# Altium PCB PIC24E_Extension_PCB.PcbDoc
Units mil, origin at the board's own origin, x right, y up, seen from the top; angles counter-clockwise.
Board outline 2730 x 2910 mil, 2 copper layers (Top Layer, Bottom Layer); 50 components, 78 nets, 280 pads, 145 vias.
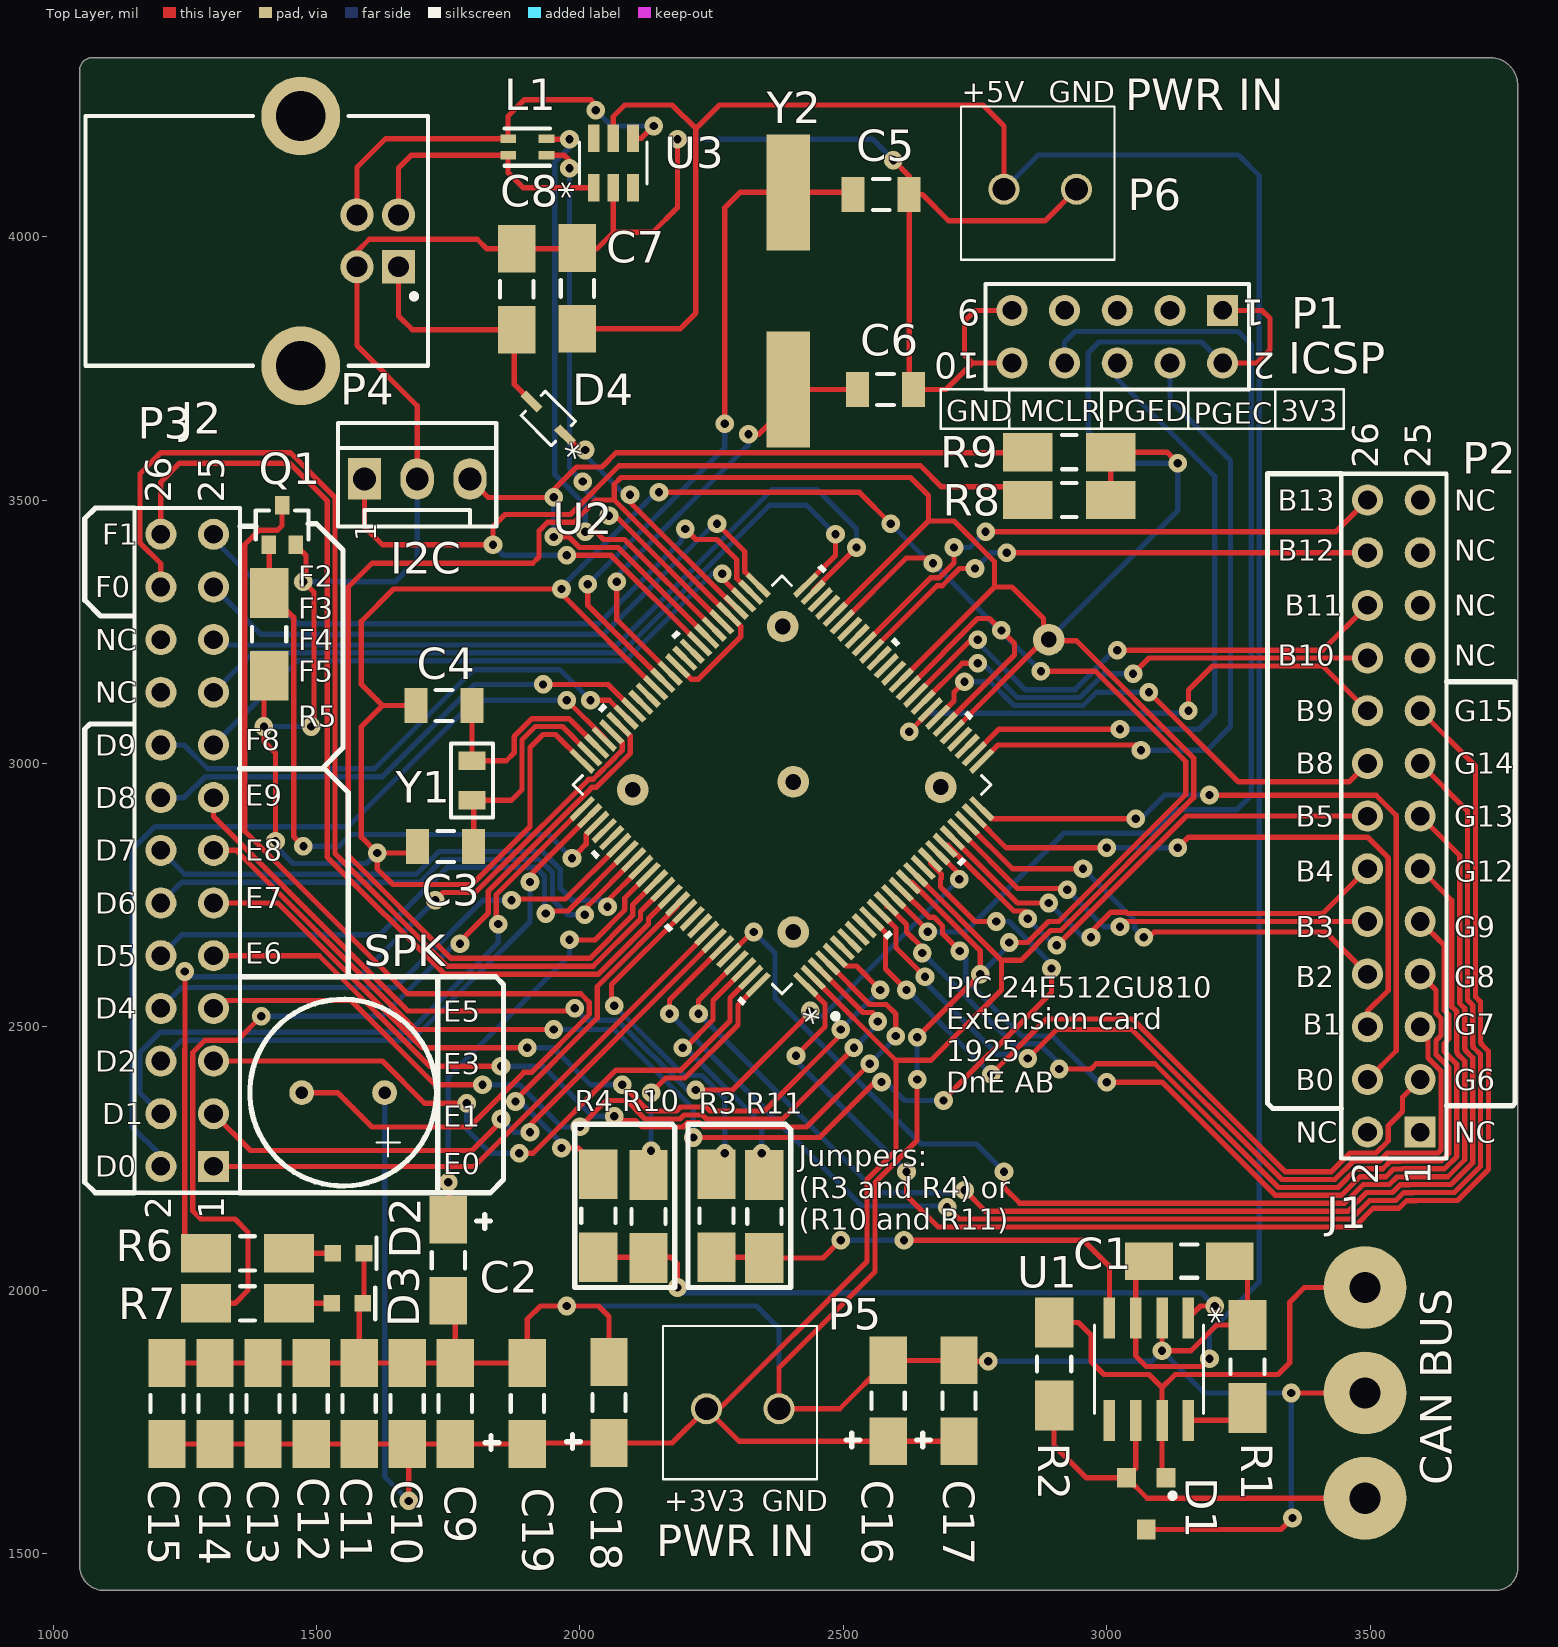
[diagram p0: Top Layer view]
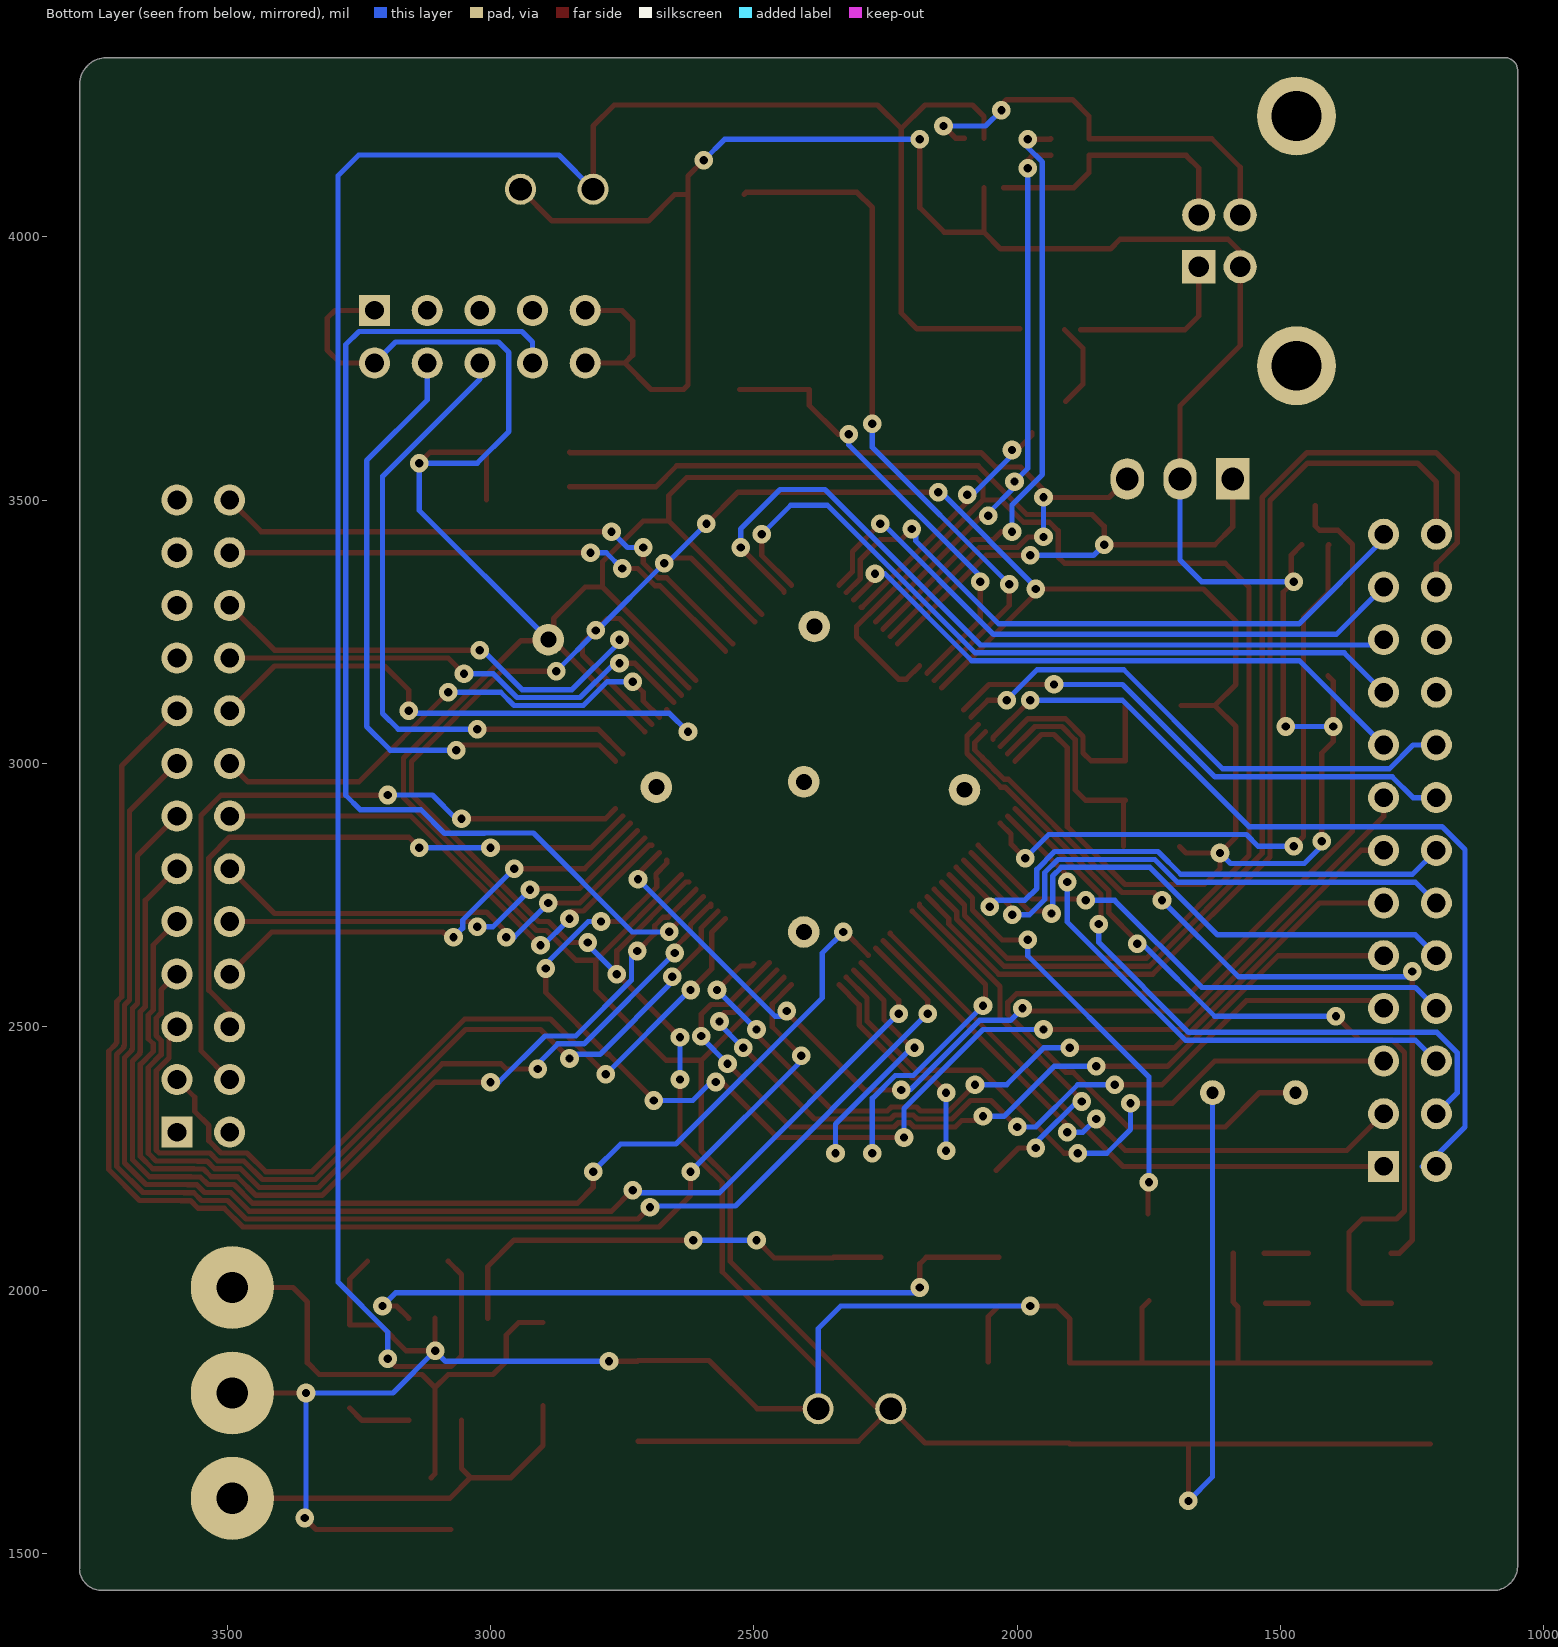
[diagram p1: Bottom Layer view, seen from below]
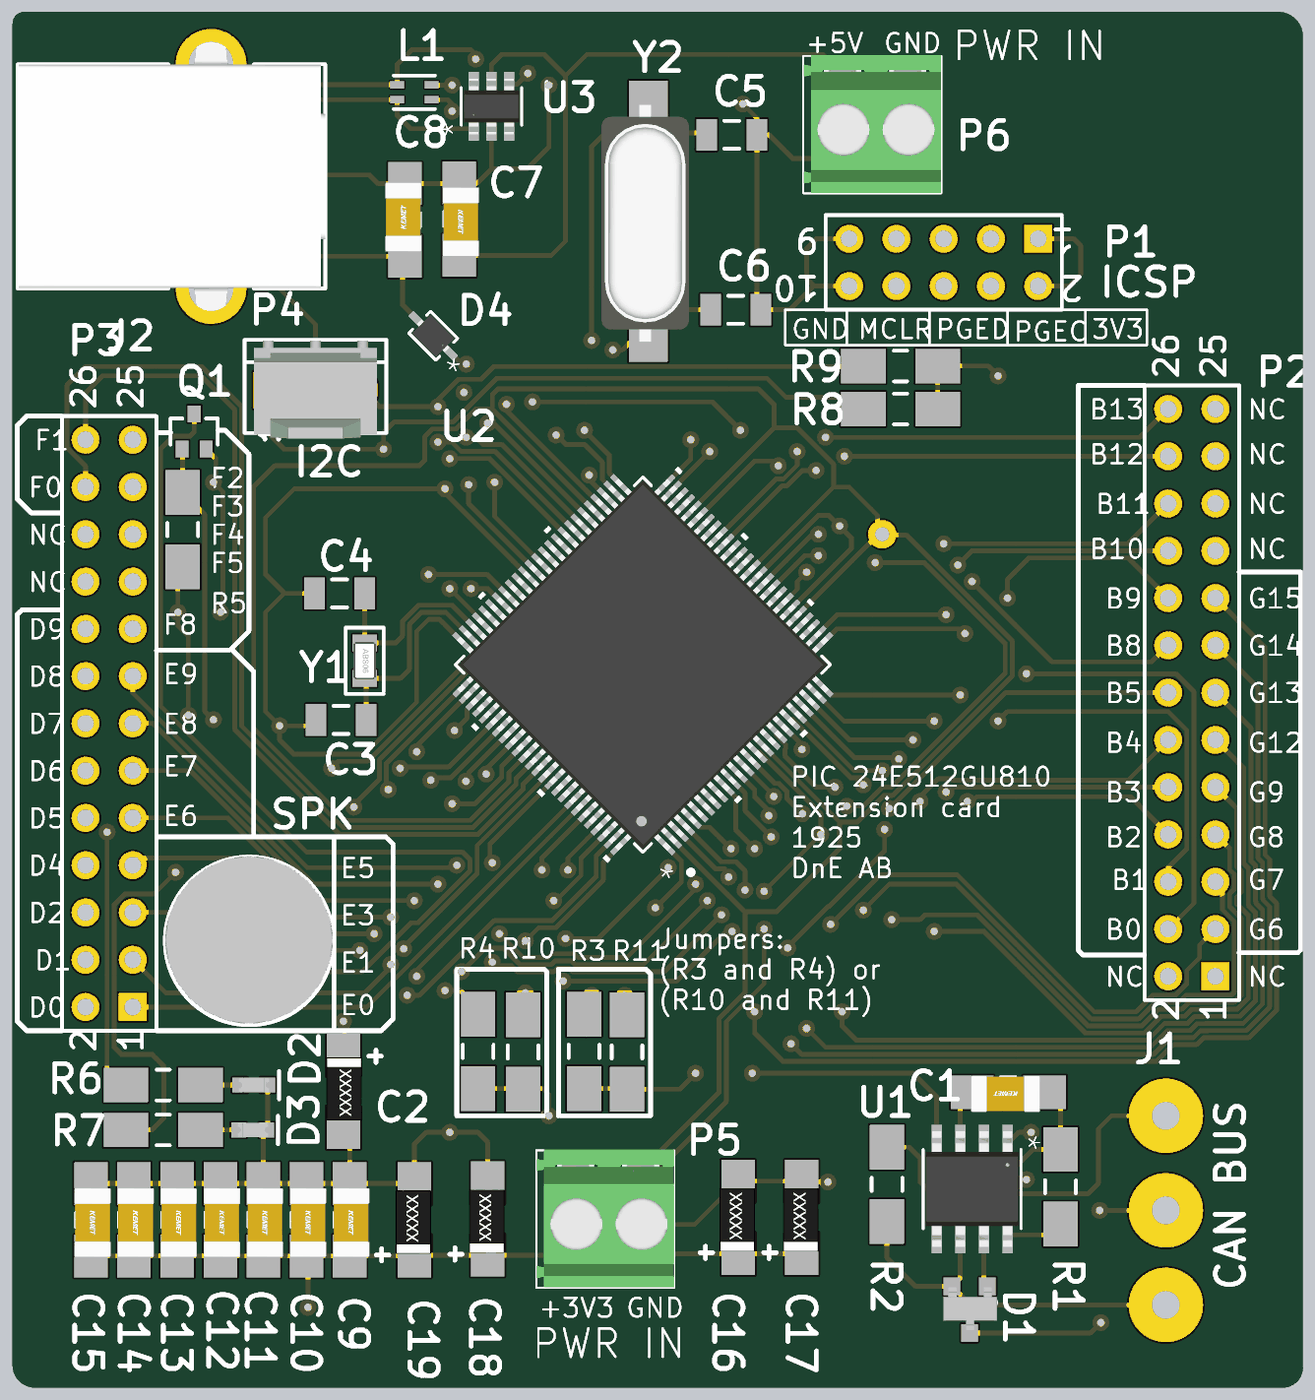
[diagram p2: 3D render of the assembled board from above, using the file's embedded part models]

## Layer stack, top to bottom
Top Solder: solder mask 0.4, Solder Resist, Dk 3.5
Top Layer: signal copper 1.4
Dielectric 1: dielectric 12.6, FR-4, Dk 4.8
Bottom Layer: signal copper 1.4
Bottom Solder: solder mask 0.4, Solder Resist, Dk 3.5

## Board outline
1050,1475 1050,4315 cw(c1075,4315) 1075,4340 3725,4340 cw(c3727.5,4287.5) 3780,4290 3780,1475 cw(c3737.5,1472.5) 3740,1430 1100,1430 cw(c1097.5,1477.5)

## Design rules (kind name [scope] priority, off if disabled: settings)
Clearance [All] p1: gap=5 ignorepadtopadclearanceinfootprint=FALSE
DiffPairsRouting [All] p1: maxlimit=10 minlimit=5 mostfreqgap=10 toplayer_minwidth=15 toplayer_maxwidth=15 toplayer_prefwidth=15 bottomlayer_minwidth=15 bottomlayer_maxwidth=15 bottomlayer_prefwidth=15 maxuncoupledlength=500
HoleToHoleClearance [All] p1: gap=5 allowstackedmicrovias=TRUE
MinimumSolderMaskSliver [All] p1: minsoldermaskwidth=5
PolygonConnect [All] p1: connectstyle=Relief reliefconductorwidth=10 reliefentries=4 polygonreliefangle="90 Angle" airgapwidth=10
RoutingVias [All] p1: holewidth=15.75 width=35.43 viastyle="Through Hole" minholewidth=15.75 minwidth=35.43 maxholewidth=23.62 maxwidth=39.37
SilkToSilkClearance [All] p1: silktosilkclearance=0
SilkToSolderMaskClearance [IsPad] p1: minsilkscreentomaskgap=0 clearancetoexposedcopper=TRUE
SolderMaskExpansion [All] p1: expansion=4
Width [All] p1: maxlimit=10 minlimit=10 preferedwidth=10
25 further rules are at their usual default settings.

## Components (designator, comment, footprint, x,y, rotation, side; value= is the part's Value field where it differs from the comment)
C1 "100nF" C1206#1 3156.77,2055 r180 top
C2 "10uF" "C1206 - TANT" 1750,2056.77 r270 top
C3 "22pF" C1206#2 1745,2842.35 r180 top
C4 "22pF" C1206#2 1741.85,3110 r180 top
C5 "22pF" C1206#2 2571.72,4080 r0 top
C6 "22pF" C1206#2 2580,3710 r0 top
C7 "100nF" C1206#1 1995,3901.77 r270 top
C8 "1uF" C1206#1 1880,3900 r90 top
C9 "100nF" C1206#1 1763.22,1785 r270 top
C10 "100nF" C1206#1 1672,1785 r270 top
C11 "100nF" C1206#1 1580.79,1785 r270 top
C12 "100nF" C1206#1 1489.57,1785 r270 top
C13 "100nF" C1206#1 1398.35,1785 r270 top
C14 "100nF" C1206#1 1307.14,1785 r270 top
C15 "100nF" C1206#1 1215.92,1785 r270 top
C16 "10uF" "C1206 - TANT" 2585,1790 r90 top
C17 "10uF" "C1206 - TANT" 2719.44,1790 r90 top
C18 "10uF" "C1206 - TANT" 2055,1786.77 r90 top
C19 "10uF" "C1206 - TANT" 1900,1785 r90 top
D1 "CDSOT23" SOT-23-3 3075,1595 r180 top
D2 "LED" D0603_Directional 1530.94,2070 r0 top
D3 "LED" D0603_Directional 1528.48,1975 r0 top
D4 "BAT43WS" SOD323 1940,3655 r135 top
J1 "HEADER" TerminalBlock3P508 3490,2005 r270 top
J2 "USB Type B" "USB-B RECEPTACLE" 1616.06,3992.01 r180 top
L1 "ACM2012-900-2P-T002" ACM2012 1900,4170 r180 top
P1 "Header 5X2" HDR2X5 3220,3860 r180 top
P2 "Header 13X2" HDR2X13 3595,2300 r90 top
P3 "Header 13X2" HDR2X13 1304.37,2235 r90 top
P4 "76384-303LF" HDR_1x3_2.54MM_SHDR_V2 1590.97,3540 r90 top
P5 "Terminal" SRW_TRM 2240,1775 r0 top
P6 "Terminal" SRW_TRM 2805,4090 r0 top
Q1 "MOSFET N-CH 20V 1A SOT323" SC70_SOT323 1434.41,3452.4 r90 top
R1 "10R" R1206 3267.08,1855 r90 top
R2 "120R" R1206 2900,1860 r90 top
R3 "0R" R1206 2259.16,2141.26 r270 top
R4 "0R" R1206 2035,2141.26 r270 top
R5 "47k5" R1206 1410,3245 r90 top
R6 "240R" R1206 1368.74,2070 r180 top
R7 "240R" R1206 1368.74,1975 r180 top
R8 "1K" R1206 2928.74,3500 r0 top
R9 "1K" R1206 2928.74,3590.84 r0 top
R10 "0R" R1206 2130,2140 r270 top
R11 "0R" R1206 2350,2140 r270 top
SPK "GT-0903A" GT-0903A 1629.22,2375 r180 top (schematic designator LS1)
U1 "296-26335-1-ND" D8 3080,1850 r270 top value=Value
U2 "PIC24EP512GU810-I/PF-ND" TQFP100_14x14MC 2383.49,2959.22 r135 top value=Value
U3 "TVS DIODE 5V 8.1V SOT23-6" 21-0058I 2063.25,4140 r90 top value=Value
Y1 "XTAL-32.7680kHz" "C0805 - OSC" 1795,2967.6 r270 top
Y2 "XTAL-8MHz" HC49/US 2395,3897.01 r90 top

## Footprints (in the part's own frame and the unit in brackets; to place one, negate y for a bottom-side part, rotate by r counter-clockwise, add the part's x,y. Pads: shape width x height; smd on the part's side, far side on the other; paste and mask are expansions set on the pad)
21-0058I [mil]
  rect 52x22 smd paste+0 mask+0: 1(-47,37.4) 2(-47,0) 3(-47,-37.4) 4(47,-37.4) 5(47,0) 6(47,37.4)
  silkscreen extent -40,-64 40,64, body extent -59,-59 59,59, height 57
ACM2012 [mm]
  rect 0.75x0.4 smd mask+0.076: 1(-0.925,0.4) 2(-0.925,-0.4) 3(0.925,-0.4) 4(0.925,0.4)
  silkscreen extent -1.1,-0.9 1.1,0.9, body extent -1.2,-0.7 1.2,0.7, height 1.3
"C0805 - OSC" [mm]
  rect 0.9x1.3 smd: 1(-0.95,0) 2(0.95,0)
  silkscreen extent -1.78,-1.02 1.78,1.02, body extent -1,-0.6 1,0.6, height 0.61
C1206#1 [mm]
  rect 2.3x1.8 smd: 1(-1.95,0) 2(1.95,0)
  silkscreen extent -0.4,-0.8 0.4,0.8, body extent -1.7,-0.89 2,1.06, height 1.85
C1206#2 [mm] "Chip Capacitor, Body 3.2x1.6mm, IPC High Density"
  rect 1.1x1.7 smd: 1(-1.35,0) 2(1.35,0)
  silkscreen extent -0.4,-0.75 0.4,0.75, body extent -1.7,-0.9 1.7,0.9, height 1.3
"C1206 - TANT" [mm]
  rect 2.3x1.8 smd: 1(-1.95,0) 2(1.95,0)
  silkscreen extent -2.21,-0.8 0.4,2.03, body extent -1.83,-0.91 1.57,0.99, height 1.77
D8 [mil]
  rect 78x22 smd paste+0 mask+0: 1(-97,75) 2(-97,25) 3(-97,-25) 4(-97,-75) 5(97,-75) 6(97,-25) 7(97,25) 8(97,75)
  silkscreen extent -84,-104 84,104, body extent -122,-98 122,99, height 69
D0603_Directional [mm]
  rect 0.8x0.8 smd: 1(0,0) 2(1.5,0)
  silkscreen extent 2.11,-0.76 2.11,0.76, body extent -0.05,-0.39 1.57,0.39, height 0.71
GT-0903A [mm]
  round 1.2 hole 0.6: 1(0,0) 2(4,0)
  silkscreen extent -2.5,-4.5 6.5,4.5, body extent -2.5,-4.55 6.5,4.45, height 4.21
HC49/US [mm]
  rect 5.6x2.1 smd: 1(-4.75,0) 2(4.75,0)
  body extent -6.45,-2.18 6.25,2.51, height 4.06
HDR2X5 [mm] "Connector; Header; 5x2 Position"
  rect 1.5x1.5 hole 0.9: 1(0,0)
  round 1.5 hole 0.9: 2(0,2.54) 3(2.54,0) 4(2.54,2.54) 5(5.08,0) 6(5.08,2.54) 7(7.62,0) 8(7.62,2.54) 9(10.16,0) 10(10.16,2.54)
  silkscreen extent -1.27,-1.27 11.43,3.81
HDR2X13 [mm] "Connector; Header; 13x2 Position"
  rect 1.5x1.5 hole 0.9: 1(0,0)
  round 1.5 hole 0.9: 2(0,2.54) 3(2.54,0) 4(2.54,2.54) 5(5.08,0) 6(5.08,2.54) 7(7.62,0) 8(7.62,2.54) 9(10.16,0) 10(10.16,2.54) 11(12.7,0) 12(12.7,2.54) 13(15.24,0) 14(15.24,2.54) 15(17.78,0) 16(17.78,2.54) 17(20.32,0) 18(20.32,2.54) 19(22.86,0) 20(22.86,2.54) 21(25.4,0) 22(25.4,2.54) 23(27.94,0) 24(27.94,2.54) 25(30.48,0) 26(30.48,2.54)
  silkscreen extent -1.27,-1.27 31.75,3.81
HDR_1x3_2.54MM_SHDR_V2 [mm]
  rect 2x1.6 hole 1.1: 1(0,0)
  oval 2x1.6 hole 1.1: 2(0,-2.54) 3(0,-5.08)
  silkscreen extent -2.3,-6.35 2.7,1.27, body extent -2.6,-5.85 2.65,0.77, height 9.34
R1206 [mm]
  rect 2.4x1.85 smd: 1(-2,0) 2(2,0)
  silkscreen extent -0.35,-0.82 0.35,0.82, body extent -1.75,-0.91 1.75,0.91, height 0.7
SC70_SOT323 [mm]
  rect 0.9x0.7 smd: 1(-0.95,0.65) 2(-0.95,-0.65) 3(0.95,0)
  silkscreen extent -0.7,-1.27 0.7,1.27, body extent -1.27,-1.27 1.27,1.27, height 1.1
SOD323 [mm]
  rect 1.111x0.401 smd paste+0 mask+0: 1(-1.15,0) 2(1.15,0)
  silkscreen extent -1.03,-0.83 1.03,0.83, body extent -1.35,-0.7 1.35,0.7, height 0.81
SOT-23-3 [mm] "SOT-23; 3 Leads; Body 3.0 x 2.6 mm, inc. leads (LxW max)"
  rect 0.9x0.95 smd: 1(-0.95,-1.25) 2(0.95,-1.25) 3(0,1.25)
  silkscreen extent -1.39,-0.51 -1.14,-0.26, body extent -1.49,-1.2 1.43,1.1, height 1.03
SRW_TRM [mm]
  round 1.5 hole 1.1: 1(0,0) 2(3.5,0)
  silkscreen extent -2.08,-3.4 5.33,3.99, body extent -2.07,-3.38 5.33,4.02, height 8.42
TerminalBlock3P508 [mm]
  round 4 hole 1.5: 1(0,0) 2(5.08,0) 3(10.16,0)
TQFP100_14x14MC [mil]
  rect 58x11 smd paste+0 mask+0: 1(-300,236.22) 2(-300,216.54) 3(-300,196.85) 4(-300,177.17) 5(-300,157.48) 6(-300,137.8) 7(-300,118.11) 8(-300,98.43) 9(-300,78.74) 10(-300,59.06) 11(-300,39.37) 12(-300,19.69) 13(-300,0) 14(-300,-19.68) 15(-300,-39.37) 16(-300,-59.06) 17(-300,-78.74) 18(-300,-98.43) 19(-300,-118.11) 20(-300,-137.8) 21(-300,-157.48) 22(-300,-177.17) 23(-300,-196.85) 24(-300,-216.54) 25(-300,-236.22) 51(300,-236.22) 52(300,-216.54) 53(300,-196.85) 54(300,-177.17) 55(300,-157.48) 56(300,-137.8) 57(300,-118.11) 58(300,-98.43) 59(300,-78.74) 60(300,-59.06) 61(300,-39.37) 62(300,-19.68) 63(300,0) 64(300,19.68) 65(300,39.37) 66(300,59.06) 67(300,78.74) 68(300,98.43) 69(300,118.11) 70(300,137.8) 71(300,157.48) 72(300,177.17) 73(300,196.85) 74(300,216.54) 75(300,236.22)
  rect 11x58 smd paste+0 mask+0: 26(-236.22,-300) 27(-216.54,-300) 28(-196.85,-300) 29(-177.17,-300) 30(-157.48,-300) 31(-137.8,-300) 32(-118.11,-300) 33(-98.43,-300) 34(-78.74,-300) 35(-59.06,-300) 36(-39.37,-300) 37(-19.69,-300) 38(0,-300) 39(19.69,-300) 40(39.37,-300) 41(59.06,-300) 42(78.74,-300) 43(98.43,-300) 44(118.11,-300) 45(137.8,-300) 46(157.48,-300) 47(177.17,-300) 48(196.85,-300) 49(216.54,-300) 50(236.22,-300) 76(236.22,300) 77(216.54,300) 78(196.85,300) 79(177.17,300) 80(157.48,300) 81(137.8,300) 82(118.11,300) 83(98.43,300) 84(78.74,300) 85(59.06,300) 86(39.37,300) 87(19.69,300) 88(0,300) 89(-19.68,300) 90(-39.37,300) 91(-59.06,300) 92(-78.74,300) 93(-98.43,300) 94(-118.11,300) 95(-137.8,300) 96(-157.48,300) 97(-177.17,300) 98(-196.85,300) 99(-216.54,300) 100(-236.22,300)
  silkscreen extent -349,-349 349,349, body extent -315,-315 315,315, height 47
"USB-B RECEPTACLE" [mm]
  rect 1.6x1.6 hole 1: 1(-1,1.25)
  round 1.6 hole 1: 2(-1,-1.25) 3(1,-1.25) 4(1,1.25)
  round 3.8 hole 2.4: 5(3.71,6.02) 6(3.71,-6.02)
  silkscreen extent -2.43,-6.02 14.1,6.02, body extent -2.44,-7.45 14.06,7.45, height 11.02

## Part data
C1 C7 C9 C10 C11 C12 C13 C14 C15: library part CL05A104KA5NNNC, "MLCC (3216) 1206 100nF 100VDC ±10% X7R", Applications="General Purpose", Product Name=CL31B104KCFNNNE
C2 C16 C17 C18 C19: library part T491A106K016AT, "CAP.TANTAL 10uF 16V 10% A CASE (3216) SMD", Product Name=T491A106K016AT
C3 C4 C5 C6: library part CL21A226MOCLRNC, "MLCC (3216) 1206 22pF 50VDC ±5% C0G (NP0)", Product Name=CL31C220JBCNNNC
C8: library part CGA5L3X8R1H105K1, "MLCC (3216) 1206 1uF 16VDC ±5% X7R", Product Name=CL31B105JOFNNNE
D1: "DIODE TVS 24VWM 40VC SOT23", Product Name=CDSOT23-T24CAN
D2 D3: library part "LS Q976-NR-1", "LED RED DIFFUSED 0603 SMD", Color=Red, Current - Test=20mA, Lens Color=White, Manufacturer 1="OSRAM Opto Semiconductors Inc.", Millicandela Rating=104mcd, Package / Case="0603 (1608 Metric)", Supplier Device Package=0603, Supplier Part Number 1=475-2512-1-ND, Voltage - Forward (Vf) (Typ)=2V, Category=Optoelectronics, ComponentLink1Description=https://dammedia.osram.info/media/resource/hires/osram-dam-2493499/LS%20Q976.pdf, ComponentLink1URL=https://dammedia.osram.info/media/resource/hires/osram-dam-2493499/LS%20Q976.pdf, Description 1="LED RED DIFFUSED 0603 SMD", Features=-, Height (Max)=0.80mm, LatestRevisionDate=08-Jul-2005, LatestRevisionNote="Mech Layer 1 removed.", Lens Style/Size="Rectangle with Flat Top, 1.00mm x 0.80mm", Lens Transparency=Diffused, Manufacturer Part Number 1="LS Q976-NR-1", Mounting Type="Surface Mount", PackageDescription="LED; 2 Leads", PackageReference=LED-0, Packaging="Cut Tape (CT)", Part Status=Active, Pricing 1="1=0.38, 10=0.274, 25=0.202, 100=0.1444, 250=0.0982, 500=0.08664, 1000=0.06787 (USD)", Published=8-Jun-2000, Publisher="Altium Limited", RoHS="RoHS Compliant", Size / Dimension="1.60mm L x 0.80mm W", Stock 1=127302, Supplier 1=Digi-Key, Viewing Angle=160°, Wavelength - Dominant=633nm, Wavelength - Peak=645nm
D4: library part BAT43WS-7-F, "DIODE SCHOTTKY 30V 200MA SOD323", Capacitance @ Vr, F="10pF @ 1V, 1MHz", Current - Average Rectified (Io)="200mA (DC)", Manufacturer 1="Diodes Incorporated", Operating Temperature - Junction="-55°C ~ 125°C", Package / Case="SC-76, SOD-323", Supplier Device Package=SOD-323, Supplier Part Number 1=BAT43WS-FDICT-ND, Base Part Number=BAT43WS, Category="Discrete Semiconductor Products", ComponentLink1Description=https://www.diodes.com/assets/Datasheets/ds30100.pdf, ComponentLink1URL=https://www.diodes.com/assets/Datasheets/ds30100.pdf, Description 1="DIODE SCHOTTKY 30V 200MA SOD323", Diode Type=Schottky, Manufacturer Part Number 1=BAT43WS-7-F, Mounting Type="Surface Mount", Packaging="Cut Tape (CT)", Part Status=Active, Pricing 1="1=0.47, 10=0.352, 100=0.2028, 500=0.13698, 1000=0.10685 (USD)", RoHS="RoHS Compliant", Speed="Small Signal =< 200mA (Io), Any Speed", Stock 1=45041, Supplier 1=Digi-Key
J1: library part 796644-3, "PIN HEADER 3PIN(1x3) 2.00mm THT V/T", Product Name=L-KLS1-207B-1-03-S
J2: library part 292304-1, "CONNECTOR USB B TYPE RIGHT ANGLE 90C CONNFLY", Product Name=DS1099-WN0
L1: "CHOKE COMM MODE 90 OHM .4A SMD", Current=400mA, DC Resistance (DCR)="190 mOhm Max", Inductance=-, Manufacturer="TDK Corporation", Operating Temperature="-25°C ~ 85°C", Package / Case="0805 (2012 Metric), 4 Lead", Power (Watts)="0.063W, 1/16W", Resistance (Ohms)=8.2K, Supplier Part Number 1=445-2207-1-ND, Temperature Coefficient=±100ppm/°C, Tolerance=±1%, .Checked PCB=CHK, .Checked SCH=CHK, Category=Filters, ComponentLink1Description=http://www.tdk.co.jp/tefe02/e9719_acm2012.pdf, ComponentLink1URL=http://www.tdk.co.jp/tefe02/e9719_acm2012.pdf, ComponentLink2Description=http://www.yageo.com/documents/recent/PYu-RC0402_51_RoHS_L_6.pdf, ComponentLink2URL=http://www.yageo.com/documents/recent/PYu-RC0402_51_RoHS_L_6.pdf, Composition="Thick Film", Features=-, Filter Type="Data, Signal Line", Height="0.016\" (0.40mm)", Height (Max)="0.051\" (1.30mm)", Impedance="90 Ohm", Manufacturer Part Number=ACM2012-900-2P-T002, Mounting Type="Surface Mount", Number of Lines=2, Number of Terminations=2, Packaging="Cut Tape (CT)", Pricing 1="1=0.48, 10=0.448, 50=0.42, 100=0.364, 500=0.308, 1000=0.252 (USD)", RoHS="RoHS Compliant", Size / Dimension="0.079\" L x 0.047\" W (2.00mm x 1.20mm)", Stock 1=175768, Supplier 1=Digi-Key
P1: "Header, 5-Pin, Dual row", LatestRevisionDate=17-Jul-2002, LatestRevisionNote="Re-released for DXP Platform.", Publisher="Altium Limited"
P2 P3: "Header, 13-Pin, Dual row", LatestRevisionDate=17-Jul-2002, LatestRevisionNote="Re-released for DXP Platform.", Publisher="Altium Limited"
P4: "CONN HEADER 3POS .100\" STR GOLD", Color=Black, Manufacturer=FCI, Supplier Part Number 1=609-1305-ND, .Checked PCB=CHK, .Checked SCH=CHK, .Creator=MM, Category="Connectors, Interconnects", ComponentLink1Description=http://portal.fciconnect.com/Comergent//fci/drawing/76384.pdf, ComponentLink1URL=http://portal.fciconnect.com/Comergent//fci/drawing/76384.pdf, Connector Type="Header, Shrouded", Contact Finish="Gold, GXT™", Contact Finish Thickness="30µin (0.76µm)", Contact Mating Length="0.197\" (5.00mm)", Contact Type="Male Pin", Fastening Type="Friction Lock", Features=-, Manufacturer Part Number=76384-303LF, Mounting Type="Through Hole", Number of Positions=3, Number of Positions Loaded=All, Number of Rows=1, Packaging=Tube, Pitch="0.100\" (2.54mm)", Pricing 1="1=0.59, 10=0.556, 25=0.5, 50=0.4444, 100=0.426, 250=0.38892, 500=0.3704, 1000=0.30558, 2500=0.2778 (USD)", RoHS="RoHS Compliant", Row Spacing=-, Stock 1=1441, Supplier 1=Digi-Key, Termination=Solder
P5: library part "Header 2", "TERM.BLK.3.50MM 2P PCB TYPE GREEN", Product Name=DG350-3.5-02P-14-02AH
P6: library part "Header 2", "TERM.BLK.5.00MM 3P PCB TYPE 0 BOY GREEN GOLTEN", Product Name=GT126-5.0-03P-14-00AH
Q1: library part DMG1012UW-7, Current - Continuous Drain (Id) @ 25°C="1A (Ta)", Drive Voltage (Max Rds On,  Min Rds On)="1.8V, 4.5V", Manufacturer 1="Diodes Incorporated", Operating Temperature="-55°C ~ 150°C (TJ)", Package / Case="SC-70, SOT-323", Power Dissipation (Max)="290mW (Ta)", Supplier Device Package=SOT-323, Supplier Part Number 1=DMG1012UW-7DICT-ND, Category="Discrete Semiconductor Products", Code_JEDEC=TO-220-AB, ComponentLink1Description="Manufacturer Link", ComponentLink1URL=http://www.irf.com/, ComponentLink2Description=https://www.diodes.com/assets/Datasheets/ds31859.pdf, ComponentLink2URL=https://www.diodes.com/assets/Datasheets/ds31859.pdf, DatasheetVersion=PD-9.814, Description 1="MOSFET N-CH 20V 1A SOT323", Digikey P/N=DMG1012UW-7DITR-ND, FET Feature=-, FET Type=N-Channel, LatestRevisionDate=17-Jul-2002, LatestRevisionNote="Re-released for DXP Platform.", Manufacturer Part Number 1=DMG1012UW-7, Mounting Type="Surface Mount", Note="Pin 2 is electrically connected to pin 4.", PackageReference=TO-220AB, Packaging="Cut Tape (CT)", Part Status=Active, Pricing 1="1=0.41, 10=0.37, 100=0.2074, 500=0.1111, 1000=0.07554 (USD)", Published=8-Jun-2000, Publisher="Altium Limited", Rds On (Max) @ Id, Vgs="450 mOhm @ 600mA, 4.5V", RoHS="RoHS Compliant", Stock 1=211076, Supplier 1=Digi-Key, Technology="MOSFET (Metal Oxide)", Vgs (Max)=±6V, Vgs(th) (Max) @ Id="1V @ 250µA"
R1: library part RC0402FR-0710RL, "RES.(3216) 1206 10 Ohms 1% 1/4W-S 400PPM", Product Name=1206S4F100JT5E
R2: library part RL1632R-R120-F, "RES.(3216) 1206 120 Ohms 1% 1/4W-S 100PPM", Product Name=1206S4F1200T5E
R3 R4 R10 R11: library part RC0402FR-0710RL, "RES.(3216) 1206 0 Ohms 5% 1/4W-S 800PPM", Product Name=1206S4J0000TDE
R5: library part RC0402FR-0747K5L, "RES.(3216) 1206 47.5K Ohms 1% 1/4W-S 100PPM", Product Name=1206S4F4752T5E
R6 R7: library part RMCF0402FT240R, "RES.(3216) 1206 240 Ohms 1% 1/4W-S 100PPM", Product Name=1206S4F2400T5E
R8 R9: library part ERJ-2RKF1001X, "RES.(3216) 1206 1K Ohms 1% 1/4W-S 100PPM", Product Name=1206S4F1001T5E
SPK: "AUDIO MAGNETIC XDCR 2-4V TH", Current - Supply=80mA, Frequency=2.73kHz, Manufacturer 1="Soberton Inc.", Operating Mode="Single Tone", Operating Temperature="-20°C ~ 60°C", Ratings=-, Supplier Part Number 1=433-1032-ND, Voltage Range="2 ~ 4V", Approvals=-, Category="Audio Products", ComponentLink1Description=http://cirlw3yrzg4afc1x47lv2k18.wpengine.netdna-cdn.com/wp-content/uploads/2016/10/GT-0903A-Rev.A_2016-1.pdf, ComponentLink1URL=http://cirlw3yrzg4afc1x47lv2k18.wpengine.netdna-cdn.com/wp-content/uploads/2016/10/GT-0903A-Rev.A_2016-1.pdf, Description 1="AUDIO MAGNETIC XDCR 2-4V TH", Driver Circuitry="Transducer, Externally Driven", Duration=-, Height - Seated (Max)="0.197\" (5.00mm)", Input Type="Zero-Peak Signal", Manufacturer Part Number 1=GT-0903A, Mounting Type="Through Hole", Packaging=Tray, Part Status=Active, Port Location=Top, Pricing 1="1=0.97, 10=0.774, 25=0.7036, 50=0.658, 100=0.6125, 250=0.56, 500=0.5215, 1000=0.4865, 5000=0.4375 (USD)", RoHS="RoHS Compliant", Size / Dimension="0.354\" Dia (9.00mm)", Sound Pressure Level (SPL)="85dB @ 3V, 10cm", Stock 1=13944, Supplier 1=Digi-Key, Technology=Magnetic, Termination="PC Pins"
U1: library part SN65HVD1050DR, "IC EMC CAN TRANSCEIVER 8-SOIC", Base Part Number=SN65HVD1050, Manufacturer="Texas Instruments", Operating Temperature="-40°C ~ 125°C", Package / Case="8-SOIC (0.154\", 3.90mm Width)", Supplier Device Package=8-SOIC, Voltage - Supply="4.5 V ~ 5.5 V", .Checked PCB=CHK, .Checked SCH=CHK, Built_By=EMA_UL_Team, C="Copyright (C) 2015 Accelerated Designs. All rights reserved", Category="Integrated Circuits (ICs)", ComponentLink1Description=http://www.ti.com/lit/ds/symlink/sn65hvd1050.pdf, ComponentLink1URL=http://www.ti.com/lit/ds/symlink/sn65hvd1050.pdf, Data Rate=-, Description 1="IC EMC CAN TRANSCEIVER 8-SOIC", Duplex=Half, Manufacturer 1="Texas Instruments", Manufacturer_Part_Number=SN65HVD1050DR, Manufacturer Part Number 1=SN65HVD1050DR, Mounting Type="Surface Mount", Number of Drivers/Receivers=1/1, Packaging="Cut Tape (CT)", Part Status=Active, Pricing 1="1=1.36, 10=1.215, 100=0.9476, 500=0.7828, 1000=0.618 (USD)", Protocol=CANbus, RefDes=RefDes, RoHS="RoHS Compliant", Stock 1=82774, Supplier 1=Digi-Key, Supplier Part Number 1=296-26335-1-ND, Type=DEV, Vendor="Texas Instruments"
U2: library part PIC24EP512GU810-, "IC MCU 16BIT 512KB FLASH 100TQFP", Base Part Number=PIC24EP512GU810, Manufacturer 1="Microchip Technology", Manufacturer_Part_Number=PIC24EP512GU810-I/PT, Manufacturer Part Number 1=PIC24EP512GU810-I/PF, Operating Temperature="-40°C ~ 85°C (TA)", Package / Case=100-TQFP, Supplier Device Package="100-TQFP (14x14)", Voltage - Supply (Vcc/Vdd)="3 V ~ 3.6 V", .Checked PCB=CHK, .Checked SCH=CHK, Built_By=EMA_UL_Team, C="Copyright (C) 2015 Accelerated Designs. All rights reserved", Category="Integrated Circuits (ICs)", ComponentLink1Description=http://www.microchip.com/mymicrochip/filehandler.aspx?ddocname=en554454, ComponentLink1URL=http://www.microchip.com/mymicrochip/filehandler.aspx?ddocname=en554454, Connectivity="CANbus, I²C, IrDA, LINbus, SPI, UART/USART, USB OTG", Core Processor=PIC, Core Size=16-Bit, Data Converters="A/D 32x10b/12b", Description 1="IC MCU 16BIT 512KB FLASH 100TQFP", EEPROM Size=-, Oscillator Type=Internal, Packaging=Tray, Part Status=Active, Peripherals="Brown-out Detect/Reset, DMA, POR, PWM, WDT", Pricing 1="1=9.23, 25=8.4668 (USD)", Program Memory Size="512KB (170K x 24)", Program Memory Type=FLASH, RAM Size="24K x 16", RefDes=RefDes, RoHS="RoHS Compliant", Speed="60 MIPs", Stock 1=5419, Supplier 1=Digi-Key, Supplier Part Number 1=PIC24EP512GU810-I/PF-ND, Type=Type, Vendor=Microchip
U3: library part MAX3207EAUT+T, "MAX3207E", Capacitance @ Frequency=-, Manufacturer 1="Maxim Integrated", Operating Temperature="-40°C ~ 125°C (TA)", Package / Case=SOT-23-6, Power Line Protection=Yes, Supplier Part Number 1=MAX3207EAUT+TCT-ND, .Checked PCB=CHK, .Checked SCH=CHK, Applications="USB OTG", Base Part Number=MAX3207E, Built_By=EMA_UL_Team, C="Copyright (C) 2015 Accelerated Designs. All rights reserved", Category="Circuit Protection", ComponentLink1Description=https://datasheets.maximintegrated.com/en/ds/MAX3205E-MAX3208E.pdf, ComponentLink1URL=https://datasheets.maximintegrated.com/en/ds/MAX3205E-MAX3208E.pdf, Current - Peak Pulse (10/1000µs)=-, Description 1="TVS DIODE SOT23-6", Manufacturer_Part_Number=MAX3207EAUT+T, Manufacturer Part Number 1=MAX3207EAUT+T, Mounting Type="Surface Mount", Packaging="Cut Tape (CT)", Part Status=Active, Power - Peak Pulse=-, Pricing 1="1=1.3, 10=1.224, 25=0.9792, 50=0.9302, 100=0.8568, 250=0.81276, 500=0.78336 (USD)", RefDes=RefDes, RoHS="RoHS Compliant", Stock 1=8902, Supplier 1=Digi-Key, Supplier Device Package=SOT-23-6, Type=DEV, Vendor="Maxim Integrated Products", Voltage - Breakdown (Min)=-, Voltage - Clamping (Max) @ Ipp=-, Voltage - Reverse Standoff (Typ)=-
Y1: library part Crystal-8MHz, "CRYSTAL 32.7680kHz 20ppm 12.5pF SMD", Product Name=ABS06-32.768KHZ-T
Y2: library part Crystal-8MHz, "CRYSTAL 8.0000MHZ 18PF SMD", Product Name=ABLS-8.000MHZ-B2-T

## Free pads (board coordinates)
  round 60 hole 30: 2(2890,3235) 3(2100,2950) 4(2385,3260) 5(2685,2955) 6(2405,2680) 7(2405,2965)

## Via types
v1: diameter 35.43, hole 15.75, Top Layer to Bottom Layer, tented both sides, 145 vias

## Nets (pads, with @x,y where several pads share a name; then routed paths per layer and width w, separated by ;. In a path a pad name is that pad's centre, name@x,y a point inside that pad or via, vN(x,y) a via of type N, cw(c..) or ccw(c..) an arc to the next point about the centre after c; other vN are vias at no path point)
+3V3: C9.2 C10.2 C11.2 C12.2 C13.2 C14.2 C15.2 C16.1 C17.1 C18.1 C19.1 P1.1 P1.2 P5.1 pad.2 R8.2 R9.2 SPK.1 U2.2 U2.16 U2.30 U2.37 U2.46 U2.55 U2.62 U2.86 | length 10717.8
  Top Layer w10: C15.2 C10.2 ; v1(1675,1600) 1675,1705.23 C10.2 ; U2.86 2100,2731.41 2100,2711.21 2018.79,2630 1755,2630 1560,2825 1560,3335 1605,3380 1910.41,3380 1922.28,3391.87 1922.28,3441.48 1938.52,3457.72 1988.13,3457.72 2030.41,3500 2065,3500 ; U2.62 2210.55,3160 2225,3160 2305,3240 2305,3260.42 U2.55 2282.29,3282.71 2065,3500 ; U2.2 2442.51,2593.3 2599.32,2436.48 2600,2436.48 ; U2.46 2661.55,3460 ; U2.37 2787.1,3335 ; U2.16 2800,2626.23 ; U2.30 pad.2@2880,3233.03 ; C17.1 C16.1 2301.77,1713.23 P5.1 ; R8.2 R9.2 3114.16,3590.84 v1(3135,3570) ; P1.2 3285,3760 3310,3785 3310,3845 3295,3860 P1.1 ; C10.2 C9.2 C19.1 1901.77,1710 C18.1 2175,1710 P5.1 ; 2065,3500 2065,3530 2077.72,3542.72 2627.28,3542.72 2661.55,3508.45 2661.55,3460 ; P5.1 2265,1775 2544.79,2054.79 2544.79,2210.21 2600,2265.41 2600,2436.48 ; 2600,2436.48 2666.48,2436.48 2800,2570 2800,2626.23 ; 2661.55,3460 2710,3460 2787.1,3382.9 2787.1,3335 ; 2787.1,3335 2820,3335 2880,3275 pad.2@2880,3233.03 ; 2800,2626.23 2837.03,2626.23 2893.52,2682.72 2912.72,2682.72 3165,2935 3165,3010 2941.97,3233.03 pad.2@2880,3233.03
  Bottom Layer w10: SPK.1 1629.22,1645.78 v1(1675,1600) ; pad.2 3135,3480 v1(3135,3570) 3025,3570 2965,3630 2965,3780 2985,3800 3180,3800 P1.2
+5V: C1.2 C7.2 P6.1 U1.3 U3.5 | length 4710.6
  Top Layer w10: C7.2 2190,3825 2220,3855 2220,4205 ; U3.5 2063.25,4228.25 2085,4250 2175,4250 2220,4205 ; P6.1 2805,4210 2765,4250 2265,4250 2220,4205 ; C1.2 3055,2030 U1.3 3055,1875 3075,1855 3180,1855 v1(3195,1870)
  Bottom Layer w10: P6.1 2870,4155 3250,4155 3289.53,4115.47 3289.53,2015.33 3195,1920.8 v1(3195,1870)
GND: C1.1 C2.2 C3.2 C4.2 C5.2 C6.2 C7.1 C8.2 C9.1 C10.1 C11.1 C12.1 C13.1 C14.1 C15.1 C16.2 C17.2 C18.2 C19.2 D1.3 D2.2 D3.2 J1.2 J2.4 P1.9 P1.10 P4.2 P5.2 P6.2 Q1.2 R1.2 R5.1 U1.2 U2.15 U2.31 U2.36 U2.45 U2.65 U2.75 U3.2 | length 14414.9
  Top Layer w10: C15.1 C13.1 C12.1 C11.1 ; R5.1 1400,3156.26 v1(1400,3070) 1400,3041.91 1421.91,3020 v1(1421.91,2852.28) ; Q1.2 1480,3395 1480,3350 v1(1475,3345) 1495,3325 1495,3085 1480,3070 v1(1490,3070) ; D2.2 1590,1977.46 D3.2 1580.79,1968.25 C11.1 ; P4.2@1670,3560.97 P4.2 1690.97,3679.03 1576.69,3793.31 J2.4 1576.69,3971.69 1600,3995 1805,3995 1823.23,3976.77 C8.2 2031.77,3976.77 2063.25,4008.25 ; C4.2 1625,3110 ; C3.2 1679.5,2830 v1(1615,2830) ; C2.2 1763.22,1966.78 C9.1 ; U2.75 1953.64,3055 1930,3055 1905,3030 1905,2879.94 1795.06,2770 1645,2770 1615,2800 v1(1615,2830) ; C18.2 2055,1950 2035,1970 v1(1975,1970) 1925,1970 1900,1945 C19.2 C9.1 ; U3.2 2063.25,4008.25 ; U2.65 1965,3322.03 v1(1965,3331.25) 1646.25,3331.25 1585,3270 1585,3150 1625,3110 ; v1(2150,3515) 2530,3515 v1(2590,3455) ; v1(2185,4185) 2185,4055 2138.25,4008.25 2063.25,4008.25 ; U2.45 2619.39,3390 2660,3390 v1(2670,3380) ; v1(2595,4145) 2624.87,4115.13 C5.2 ; U2.15 2629.27,2774.93 2760,2644.2 v1(2760,2600) v1(2640,2480) ; U2.36 2754.94,3275 2777.5,3275 v1(2800,3252.5) 2825,3227.5 2825,3205.86 U2.31 ; v1(2640,2400) 2640,2284.2 2592.5,2236.7 2560,2204.2 2560,2035 2377.8,1852.8 P5.2 2493.23,1775 C16.2 C17.2 2721.21,1865 v1(2775,1865) ; v1(2815,2660) 2849.59,2660 2889.59,2700 2908.79,2700 3150,2941.21 3150,3003.79 2978.79,3175 v1(2875,3175) ; P1.10 2745,3760 ; P1.9 2750,3860 2730,3840 2730,3775 2745,3760 ; P6.2 2882.8,4030 2700,4030 2650,4080 C5.2 ; D1.3 3330.79,1545.79 v1(3352.5,1567.5) ; U1.2 v1(3105,1885) 3160,1885 3208.74,1933.74 R1.2 3267.08,2021.46 C1.1 ; v1(3350,1805) J1.2 ; C11.1 C9.1 ; v1(1615,2830) 1585,2860 1585,3070 1625,3110 ; C5.2 2624.87,3718.28 C6.2 2695,3710 2745,3760
  Bottom Layer w10: v1(1400,3070) v1(1490,3070) ; v1(1421.91,2852.28) 1421.91,2843.09 1455,2810 1595,2810 v1(1615,2830) ; v1(1475,3345) 1650,3345 1690.97,3385.97 P4.2 ; v1(1965,3331.25) 1965,3335 2145,3515 v1(2150,3515) ; v1(1975,1970) 2335,1970 2377.8,1927.2 P5.2 ; v1(2185,4185) 2555,4185 v1(2595,4145) ; v1(2590,3455) 2665,3380 v1(2670,3380) v1@2797.5,3252.5 ; v1(2640,2400) v1(2640,2480) ; v1(2760,2600) 2815,2655 v1(2815,2660) ; v1(2775,1865) 3085,1865 v1(3105,1885) 3185,1805 v1(3350,1805) 3350,1570 v1(3352.5,1567.5) ; v1(2800,3252.5) v1@2797.5,3252.5 ; v1(2875,3175) v1@2797.5,3252.5
NetC2_1: C2.1 U2.85 | length 830.2
  Top Layer w10: v1(1750,2205) 1751.77,2203.23 C2.1@1751.77,2145 ; v1(1980,2665) 2028.46,2665 2085,2721.54 2085,2744.25 U2.85
  Bottom Layer w10: v1(1750,2205) 1750,2405 1980,2635 v1(1980,2665)
NetC3_1: C3.1 U2.74 Y1.2 | length 447.4
  Top Layer w10: C3.1 1798.15,2927.05 Y1.2 1870.2,2930.2 1890,2950 1890,3045 1915,3070 1966.48,3070 U2.74
NetC4_1: C4.1 U2.73 Y1.1 | length 415.5
  Top Layer w10: C4.1 Y1.1 1860,3005 1875,3020 1875,3051.21 1908.79,3085 1979.32,3085 U2.73
NetC5_1: C5.1 U2.64 Y2.2 | length 1321.5
  Top Layer w10: v1(2015,3340) 2015,3299.87 U2.64 ; v1(2275,3645) 2275,4055 2304.02,4084.02 Y2.2 2514.55,4084.02 C5.1
  Bottom Layer w10: v1(2015,3340) 2275,3600 v1(2275,3645)
NetC6_1: C6.1 U2.63 Y2.1 | length 873
  Top Layer w10: v1(2070,3345) 2070,3272.71 U2.63 ; v1(2320,3625) 2340,3625 2395,3680 Y2.1 C6.1
  Bottom Layer w10: v1(2070,3345) 2060,3345 2320,3605 v1(2320,3625)
NetC8_1: C8.1 D4.2 J2.1 | length 493.1
  Top Layer w10: J2.1 1655.43,3849.57 1681.77,3823.23 C8.1 ; D4.2 1875,3720 1875,3788.23 C8.1@1910,3823.23
NetD1_1: D1.1 J1.1 R2.2 U1.7 | length 990.5
  Top Layer w10: R2.2 2946.26,1938.74 2970,1915 2970,1865 2995,1840 3080,1840 3105,1815 ; D1.1 3105,1651.61 U1.7 3105,1815 ; J1.1 3375,2005 3347.5,1977.5 3347.5,1862.5 3325,1840 3130,1840 3105,1815
NetD1_2: D1.2 J1.3 R2.1 U1.6 | length 823.7
  Top Layer w10: R2.1 2900,1705 2960.79,1644.21 D1.2 ; U1.6 3055,1661.61 D1.2 ; J1.3 3076.81,1605 D1.2
NetD2_1: D2.1 R6.1 | length 83.5
  Top Layer w10: R6.1 D2.1
NetD3_1: D3.1 R7.1 | length 81
  Top Layer w10: R7.1 D3.1
NetD4_1: D4.1 U2.54 | length 479
  Top Layer w10: D4.1@1972.01,3627.99 D4.1 2000,3595 v1(2010,3595) ; v1(2095,3510) 2095,3495.8 2294.17,3296.63 U2.54
  Bottom Layer w10: v1(2010,3595) 2010,3585 2085,3510 v1(2095,3510)
NetJ2_2: J2.2 L1.4 U3.1 | length 514.1
  Top Layer w10: J2.2 1655.43,4130.43 1679.25,4154.25 L1.4 1863.58,4121.42 1892,4093 U3.1
NetJ2_3: J2.3 L1.3 U3.4 | length 807.5
  Top Layer w10: J2.3 1576.69,4131.69 1630.75,4185.75 L1.3 1863.58,4228.58 1895,4260 2020,4260 2030,4250 v1(2030,4240) ; U3.4 2117,4187 v1(2140,4210)
  Bottom Layer w10: v1(2030,4240) 2060,4210 v1(2140,4210)
NetL1_1: L1.1 U2.56 | length 1052.8
  Top Layer w10: L1.1 1970.75,4154.25 1980,4145 v1(1980,4130) ; v1(2055,3470) 2057.58,3472.58 2065,3472.58 U2.56
  Bottom Layer w10: v1(1980,4130) 1980,3560 v1(2005,3535) 2005,3525 2055,3475 v1(2055,3470)
NetL1_2: L1.2 U2.57 | length 1145.8
  Top Layer w10: L1.2 1937.17,4185 v1(1980,4185) ; v1(2010,3440) 2030,3440 2045,3425 2084.74,3425 U2.57
  Bottom Layer w10: v1(1980,4185) 1980,4169.2 1952.28,4141.48 1952.28,3548.52 2010,3490.8 v1(2010,3440)
NetLS1_2: Q1.3 SPK.2 | length 2155.4
  Top Layer w10: Q1.3 1434.41,3451.24 1425.89,3442.72 1390.9,3442.72 1363.58,3415.4 1363.58,2871.42 1672.28,2562.72 2001.48,2562.72 2017.72,2546.48 2017.72,2523.52 1907.72,2413.52 1893.52,2413.52 1790,2310 1605,2310 1540,2375 SPK.2 SPK.2@1461.74,2385
NetP1_4: P1.4 U2.26 | length 1245.5
  Top Layer w10: U2.26 2793.33,3035 3055,3035 v1(3065,3025)
  Bottom Layer w10: v1(3065,3025) 3190,3025 3235,3070 3235,3575 3120,3690 P1.4
NetP1_6: P1.6 U2.27 | length 1229.7
  Top Layer w10: U2.27 2795.49,3065 v1(3025,3065)
  Bottom Layer w10: P1.6 3020,3730 3205,3545 3205,3095 3175,3065 v1(3025,3065)
NetP1_8: P1.8 U2.13 | length 2084.3
  Top Layer w10: U2.13 2660.37,2682.34 v1(2660.37,2680.43)
  Bottom Layer w10: v1(2660.37,2680.43) 2660.8,2680 2730.8,2680 2918.52,2867.72 3011.48,2867.72 3011.91,2867.28 3087.28,2867.28 3132.28,2912.28 3247.28,2912.28 3274.53,2939.53 3274.53,3795 3249.53,3820 2940,3820 2920,3800 P1.8
NetP2_3: P2.3 U2.10 | length 1472.9
  Top Layer w10: U2.10 2580,2679.19 2580,2610 v1(2620,2570) ; v1(2780.8,2410) 2885.8,2515 3048.64,2515 3338.64,2225 3426.51,2225 3461.98,2260.47 3511.37,2260.47 3534.53,2283.63 3534.53,2312.72 3561.33,2339.53 3561.33,2366.33 P2.3
  Bottom Layer w10: v1(2620,2570) 2620.8,2570 v1(2780.8,2410)
NetP2_4: P2.4 U2.25 | length 1353.4
  Top Layer w10: U2.25 2781.78,2895 v1(3055,2895) ; v1(3195,2940) 3195.47,2939.53 3511.37,2939.53 3549.53,2901.37 3549.53,2454.53 P2.4
  Bottom Layer w10: v1(3055,2895) 3065,2895 3110,2940 v1(3195,2940)
NetP2_5: P2.5 U2.11 | length 1624.2
  Top Layer w10: U2.11 2600,2687.03 2600,2650 v1(2655,2595) ; v1(2850,2440) 2905,2495 3047.43,2495 3332.43,2210 3432.72,2210 3468.19,2245.47 3517.59,2245.47 3532.59,2260.47 3628.67,2260.47 3634.53,2266.33 3634.53,2416.37 3610,2440.9 3610,2485 P2.5
  Bottom Layer w10: v1(2655,2595) 2655,2585 2792.28,2447.72 2842.28,2447.72 v1(2850,2440)
NetP2_6: P2.6 U2.24 | length 1172.2
  Top Layer w10: U2.24 2808.94,2840 v1(3000,2840) ; v1(3135,2840) 3155,2860 3495,2860 3534.53,2820.47 3534.53,2569.53 3495,2530 P2.6
  Bottom Layer w10: v1(3000,2840) v1(3135,2840)
NetP2_7: P2.7 U2.12 | length 1719.2
  Top Layer w10: U2.12 2581.7,2728.33 2585.83,2728.33 2620,2694.16 2620,2680 2650,2650 v1(2650,2640) ; v1(2910,2420) 2970,2420 2980,2430 3091.21,2430 3326.21,2195 3438.93,2195 3474.41,2230.47 3523.8,2230.47 3538.33,2245 3556.21,2245 3556.69,2245.47 3634.88,2245.47 3649.53,2260.12 3649.53,2422.59 3625,2447.11 3625,2474.1 3634.53,2483.63 3634.53,2516.37 3625,2525.9 3625,2570 P2.7
  Bottom Layer w10: v1(2650,2640) 2822.28,2467.72 2872.28,2467.72 2910,2430 v1(2910,2420)
NetP2_8: P2.8 U2.23 | length 895.8
  Top Layer w10: U2.23 2821.1,2800 v1(2955,2800) ; v1(3070,2670) 3080,2670 3090,2680 3415,2680 P2.8
  Bottom Layer w10: v1(2955,2800) 3052.72,2702.28 3052.72,2687.28 v1(3070,2670)
NetP2_9: P2.9 U2.14 | length 1843.7
  Top Layer w10: U2.14 2662.4,2708.15 2671.85,2708.15 2688.09,2691.91 2688.09,2676.91 v1(2721.14,2643.86) ; v1(3000,2395) 3105,2395 3320,2180 3445.15,2180 3480.62,2215.47 3530.01,2215.47 3544.54,2230 3562.43,2230 3562.9,2230.47 3641.1,2230.47 3664.53,2253.9 3664.53,2428.8 3640,2453.33 3640,2467.89 3649.53,2477.41 3649.53,2522.59 3640,2532.11 3640,2655 P2.9
  Bottom Layer w10: v1(2721.14,2643.86) 2732.28,2632.72 2732.28,2588.52 2838.09,2482.72 2896.48,2482.72 2984.2,2395 v1(3000,2395)
NetP2_10: P2.10 U2.22 | length 859.6
  Top Layer w10: U2.22 2830.54,2762.72 2922.28,2762.72 v1(2925,2760) ; v1(3025,2690) 3025,2700 P2.10
  Bottom Layer w10: v1(2925,2760) 2995,2690 v1(3025,2690)
NetP2_11: P2.11 U2.96 | length 2317.4
  Top Layer w10: U2.96 2326.97,2680 v1(2330,2680) ; v1(2805,2225) 2805,2195 2835,2165 3451.36,2165 3486.83,2200.47 3536.23,2200.47 3550.75,2215 3568.64,2215 3569.11,2215.47 3647.31,2215.47 3679.53,2247.69 3679.53,2435.01 3665.84,2448.7 3665.84,2450.84 3664.53,2452.15 3664.53,2528.8 3655,2538.33 3655,2740 P2.11
  Bottom Layer w10: v1(2330,2680) 2370,2640 2370,2555 2647.5,2277.5 2752.5,2277.5 v1(2805,2225)
NetP2_12: P2.12 U2.21 | length 928
  Top Layer w10: U2.21 2830.42,2735 v1(2890,2735) ; v1(2970,2670) 2970,2680 3007.72,2717.72 3036.48,2717.72 3039.2,2715 3410,2715 P2.12
  Bottom Layer w10: v1(2890,2735) 2955,2670 v1(2970,2670)
NetP2_13: P2.13 U2.97 | length 2493.1
  Top Layer w10: v1(2225,2525) 2225,2550.19 U2.97 ; v1(2730,2190) 2770,2150 3457.57,2150 3493.05,2185.47 3542.44,2185.47 3556.97,2200 3574.85,2200 3575.33,2200.47 3653.52,2200.47 3694.53,2241.48 3694.53,2441.23 3680.84,2454.92 3680.84,2457.05 3679.53,2458.36 3679.53,2535.01 3670,2544.54 3670,2825 P2.13
  Bottom Layer w10: v1(2225,2525) 2565,2185 2725,2185 v1(2730,2190)
NetP2_14: P2.14 U2.20 | length 994.9
  Top Layer w10: U2.20 2698.97,2844.53 2823.5,2720 2845,2720 2850,2715 v1(2850,2705) ; v1(2905,2655) 2906.21,2655 3151.21,2900 P2.14
  Bottom Layer w10: v1(2850,2705) 2905,2650 v1(2905,2655)
NetP2_15: P2.15 U2.95 | length 2735.3
  Top Layer w10: v1(2170,2525) 2170,2550.86 U2.95 ; v1(2696.91,2157.28) 2696.91,2161.91 2700,2165 2700,2155 2720,2135 3463.79,2135 3499.26,2170.47 3548.65,2170.47 3563.18,2185 3581.07,2185 3581.54,2185.47 3659.74,2185.47 3709.53,2235.26 3709.53,2447.44 3695.84,2461.13 3695.84,2463.26 3694.53,2464.57 3694.53,2541.23 3685,2550.75 3685,2910 P2.15
  Bottom Layer w10: v1(2170,2525) 2535,2160 2694.2,2160 v1(2696.91,2157.28)
NetP2_16: P2.16 U2.32 | length 967.1
  Top Layer w10: U2.32 2710,3118.7 2710,3135 v1(2730,3155) ; v1(3080,3135) 3250,2965 3460,2965 P2.16
  Bottom Layer w10: v1(2730,3155) 2778.79,3155 2823.79,3110 2955.41,3110 2980.41,3135 v1(3080,3135)
NetP2_17: P2.17 U2.1 | length 2624.1
  Top Layer w10: v1(2410,2445) 2465,2500 2465,2543.64 U2.1 ; v1(2620,2225) 2620,2180 2680,2120 3470,2120 3505.47,2155.47 3554.87,2155.47 3569.39,2170 3587.28,2170 3587.75,2170.47 3665.95,2170.47 3724.53,2229.05 3724.53,2453.65 3710.84,2467.34 3710.84,2469.48 3709.53,2470.79 3709.53,2547.44 3700,2556.97 3700,2995 P2.17
  Bottom Layer w10: v1(2410,2445) 2410,2435 v1(2620,2225)
NetP2_18: P2.18 U2.33 | length 1038.3
  Top Layer w10: v1(2625,3060) 2665.22,3100.22 U2.33 ; v1(3155,3100) 3155,3139.13 3200.87,3185 3410,3185 P2.18
  Bottom Layer w10: v1(2625,3060) 2660,3095 3150,3095 v1(3155,3100)
NetP2_20: P2.20 U2.34 | length 932.5
  Top Layer w10: U2.34 2725.62,3190 v1(2755,3190) ; v1(3050,3170) 3080,3200 P2.20
  Bottom Layer w10: v1(2755,3190) 2765,3190 2830,3125 2949.2,3125 2994.2,3170 v1(3050,3170)
NetP2_22: P2.22 U2.35 | length 1009.8
  Top Layer w10: U2.35 2742.78,3235 v1(2755,3235) ; v1(3020,3215) 3410,3215 P2.22
  Bottom Layer w10: v1(2755,3235) 2755,3230 2845,3140 2940,3140 3015,3215 v1(3020,3215)
NetP2_24: P2.24 U2.41 | length 1018.5
  Top Layer w10: U2.41 2678.03,3337.28 2687.69,3337.28 2720.41,3370 v1(2750,3370) ; v1(2810,3400) P2.24
  Bottom Layer w10: v1(2750,3370) 2780,3400 v1(2810,3400)
NetP2_26: P2.26 U2.42 | length 1085.2
  Top Layer w10: U2.42 2665.19,3352.28 2681.48,3352.28 2710,3380.8 v1(2710,3410) ; v1(2770,3440) 3435,3440 P2.26
  Bottom Layer w10: v1(2710,3410) 2740,3410 v1(2770,3440)
NetP3_1: P3.1 U2.93 | length 1120.3
  Top Layer w10: P3.1 1799.2,2235 2240.95,2676.76 U2.93
NetP3_2: P3.2 U2.72 | length 1696.8
  Top Layer w10: v1(1975,3120) 2046.08,3048.92 U2.72
  Bottom Layer w10: P3.2@1231.17,2235 P3.2 1204.37,2255.63 1149.84,2310.16 1149.84,2836.37 1193.47,2880 1560,2880 1800,3120 v1(1975,3120)
NetP3_3: P3.3 U2.94 | length 1183.3
  Top Layer w10: P3.3 1374.37,2265 1795,2265 1855,2325 v1(1850,2325) ; v1(1905,2300) 1905,2313.7 U2.94
  Bottom Layer w10: v1(1850,2325) 1875,2300 v1(1905,2300)
NetP3_4: P3.4 U2.76 | length 1243.3
  Top Layer w10: v1(1845,2695) 1845,2686.26 1845.23,2686.03 1841.03,2686.03 1841.03,2750.84 U2.76
  Bottom Layer w10: P3.4 1164.84,2374.53 1164.84,2451.37 1203,2489.53 1674.53,2489.53 1845,2660 v1(1845,2695)
NetP3_5: P3.5 U2.99 | length 1285.8
  Top Layer w10: P3.5 1625,2435 1705,2355 v1(1785,2355) ; v1(1885,2260) 1910.8,2260 2068.52,2417.72 2191.91,2417.72 2285,2510.8 2285,2554.51 U2.99
  Bottom Layer w10: v1(1785,2355) 1785,2305 1830,2260 v1(1885,2260)
NetP3_6: P3.6 U2.77 | length 1058.2
  Top Layer w10: v1(1905,2775) 1905,2786.96 U2.77
  Bottom Layer w10: P3.6 1243.9,2474.53 1680.74,2474.53 1905,2698.79 v1(1905,2775)
NetP3_7: P3.7 U2.3 | length 1627.6
  Top Layer w10: P3.7 1319.37,2550 1565,2550 1725,2390 v1(1815,2390) ; v1(2000,2310) 2050,2360 2088.79,2360 2123.79,2325 2189.59,2325 2197.31,2332.72 2232.69,2332.72 2240.41,2325 2385,2325 v1(2520,2460) ; U2.3 2537.04,2527.28 2556.17,2527.28
  Bottom Layer w10: v1(1815,2390) 1885,2390 1965,2310 v1(2000,2310) ; v1(2520,2460) 2570,2510 v1(2565,2510)
NetP3_8: P3.8 U2.81 | length 997.8
  Top Layer w10: v1(1870,2740) 1872.72,2742.72 1972.11,2742.72 U2.81
  Bottom Layer w10: P3.8 1243.9,2574.53 1649.53,2574.53 1815,2740 v1(1870,2740)
NetP3_9: P3.9 U2.4 | length 1720.7
  Top Layer w10: P3.9 1505,2635 1715,2425 v1(1850,2425) ; v1(2065,2330) 2072.72,2322.28 2105.29,2322.28 2117.57,2310 2195.8,2310 2203.52,2317.72 2226.48,2317.72 2234.2,2310 2430,2310 v1(2550,2430) ; U2.4 2549.88,2542.28 2581.48,2542.28 2599.57,2524.2 v1(2599.57,2482.39)
  Bottom Layer w10: v1(1850,2425) 1930,2425 2025,2330 v1(2065,2330) ; v1(2550,2430) 2599.57,2479.57 v1(2599.57,2482.39)
NetP3_10: P3.10 U2.82 | length 1077.7
  Top Layer w10: v1(1935,2715) 1940,2720 1977.23,2720 U2.82
  Bottom Layer w10: P3.10 1243.9,2674.53 1619.53,2674.53 1747.72,2802.72 1916.48,2802.72 1932.72,2786.48 1932.72,2717.28 v1(1935,2715)
NetP3_11: P3.11 U2.5 | length 1627.5
  Top Layer w10: P3.11 1426.21,2735 1701.21,2460 v1(1900,2460) ; v1(2080,2390) 2130,2340 2183.38,2340 2191.09,2347.72 2238.91,2347.72 2246.62,2340 2350,2340 2495,2485 v1(2495,2495) ; U2.5@2500,2620 2504.74,2615.26 2524.74,2615.26 v1(2570,2570)
  Bottom Layer w10: v1(1900,2460) 1950,2460 2020,2390 v1(2080,2390) ; v1(2495,2495) v1(2570,2570)
NetP3_12: P3.12 U2.83 | length 1062.1
  Top Layer w10: v1(2009.14,2712.72) 2011.86,2710 2015,2710 2015,2729.93 U2.83
  Bottom Layer w10: P3.12 1243.9,2774.53 1695.74,2774.53 1738.93,2817.72 1922.69,2817.72 1947.72,2792.69 1947.72,2741.5 1976.5,2712.72 v1(2009.14,2712.72)
NetP3_13: P3.13 U2.18 | length 2382
  Top Layer w10: P3.13 1347.43,2835 1687.43,2495 v1(1950,2495) ; v1(2215,2290) 2455,2290 2560.1,2395.1 v1(2572.28,2395.1) ; U2.18 2665.22,2810.77 2685.69,2790.29 2685.69,2782.01 2684.34,2780.66 2684.34,2765.66 2750,2700 v1(2790,2700) ; v1(2690,2360) 2690,2362.34 2775.37,2447.72 2777.72,2447.72 2895,2565 v1(2895,2610.8)
  Bottom Layer w10: v1(1950,2495) 2065,2495 2215,2345 v1(2215,2290) ; v1(2572.28,2395.1) 2580.7,2395.1 2615.8,2360 v1(2690,2360) ; v1(2790,2700) 2814.2,2700 2899.2,2615 v1(2895,2610.8)
NetP3_14: P3.14 U2.84 | length 1053.8
  Top Layer w10: v1(2052.13,2727.87) 2047.91,2732.09 2047.91,2735 U2.84
  Bottom Layer w10: P3.14 1249.84,2789.53 1689.53,2789.53 1732.72,2832.72 1928.91,2832.72 1962.72,2798.91 1962.72,2762.72 1985,2740.43 2039.57,2740.43 v1(2052.13,2727.87)
NetP3_15: P3.15 U2.19 | length 1937.3
  Top Layer w10: P3.15 1304.37,2899.27 1673.64,2530 1985,2530 v1(1990,2535) ; v1(2220,2380) 2289.8,2380 2439.9,2530.1 v1(2437.28,2530.1) ; U2.19 2720,2789.74 v1(2720,2780) 2724.2,2780 2724.87,2779.33 v1@2724.87,2784.87
  Bottom Layer w10: v1(1990,2535) 2012.72,2512.28 2071.5,2512.28 2203.79,2380 v1(2220,2380) ; v1(2437.28,2530.1) 2435,2527.82 2435,2520 2460,2520 v1(2720,2780)
NetP3_16: P3.16 U2.68 | length 1006.4
  Top Layer w10: v1(1930,3150) 2053.52,3150 U2.68
  Bottom Layer w10: P3.16 1248.47,2935 1288,2974.53 1624.53,2974.53 1800,3150 v1(1930,3150)
NetP3_17: P3.17 U2.53 | length 1166.5
  Top Layer w10: v1(2270,3360) 2270,3351.1 U2.53
  Bottom Layer w10: P3.17 1464.37,3195 2086.21,3195 2251.21,3360 v1(2270,3360)
NetP3_18: P3.18 U2.69 | length 1017.1
  Top Layer w10: v1(2020,3120) 2055.68,3120 U2.69
  Bottom Layer w10: P3.18 1248.47,3035 1293.47,2990 1610,2990 1797.72,3177.72 1962.28,3177.72 v1(2020,3120)
NetP3_19: P3.19 U2.50 | length 1470.4
  Top Layer w10: U2.50 2485,3394.8 v1(2485,3435)
  Bottom Layer w10: P3.19 1379.37,3210 2080,3210 2360,3490 2430,3490 v1(2485,3435)
NetP3_21: P3.21 U2.49 | length 1532.7
  Top Layer w10: U2.49 2442.51,3327.51 v1(2525,3410)
  Bottom Layer w10: P3.21 1314.37,3225 2070,3225 2365,3520 2450,3520 2525,3445 v1(2525,3410)
NetP3_23: P3.23 U2.51 | length 1229
  Top Layer w10: v1(2260,3455) 2312.72,3402.28 2312.72,3364.06 U2.51
  Bottom Layer w10: P3.23 1394.37,3245 2045,3245 2255,3455 v1(2260,3455)
NetP3_24: P3.24 U2.87 | length 2108.8
  Top Layer w10: P3.24 1204.37,3379.1 1164.84,3418.63 1164.84,3549.84 1205,3590 1450,3590 1535,3505 1535,2828.79 1748.79,2615 2025,2615 2115,2705 2115,2718.57 U2.87
NetP3_25: P3.25 U2.52 | length 1250.4
  Top Layer w10: v1(2200,3445) 2220,3425 2260,3425 2297.72,3387.28 2297.72,3351.22 U2.52
  Bottom Layer w10: P3.25 1304.37,3425.63 1465,3265 2035,3265 2192.5,3422.5 2192.5,3437.5 v1(2200,3445)
NetP3_26: P3.26 U2.88 | length 1946.2
  Top Layer w10: P3.26 1204.37,3534.37 1240,3570 1448.79,3570 1520,3498.79 1520,2822.57 1742.57,2600 2035,2600 2130,2695 2130,2705.74 U2.88
NetP4_1: P4.1 R8.1 U2.59 | length 1933.3
  Top Layer w10: P4.1 1590.97,3449.03 1625,3415 v1(1835,3415) 1835,3450 1857.72,3472.72 1981.91,3472.72 2074.2,3565 2646.21,3565 2686.21,3525 R8.1@2850,3525 ; v1(1975,3395) 2059.2,3395 2227.03,3227.16 U2.59
  Bottom Layer w10: v1(1835,3415) 1855,3395 v1(1975,3395)
NetP4_3: P4.3 R9.1 U2.58 | length 1561.9
  Top Layer w10: P4.3 1825.97,3505 v1(1950,3505) 1950,3519.2 1993.52,3562.72 2041.5,3562.72 2068.79,3590 2349.28,3590 2349.52,3589.76 2848.92,3589.76 R9.1 ; v1(1950,3430) 1979.2,3430 1999.2,3410 2071.9,3410 U2.58
  Bottom Layer w10: v1(1950,3430) v1(1950,3505)
NetQ1_1: Q1.1 R5.2 U2.78 | length 1241.5
  Top Layer w10: Q1.1 1410,3413.82 R5.2 1456.42,3277.32 1456.42,2861.42 v1(1475,2842.83) ; v1(1985,2820) 1975.88,2829.12 1994.12,2829.12 2011.69,2846.69 2011.69,2865.81 U2.78
  Bottom Layer w10: v1(1475,2842.83) 1542.83,2842.83 1565,2865 1940,2865 v1(1985,2820)
NetR1_1: R1.1 U1.8 | length 121.7
  Top Layer w10: U1.8 3243.82,1753 R1.1
NetR3_1: R3.1 U2.90 | length 628.9
  Top Layer w10: v1(2065,2540) 2060,2540 2060,2580.06 U2.90
  Bottom Layer w10: v1(2065,2540) 2197.28,2407.72 2231.48,2407.72 2275,2364.2 v1(2275,2260)
NetR3_2: R3.2 R11.2 U1.4 | length 879.1
  Top Layer w10: R3.2 2348.74,2062.52 R11.2 2461.26,2061.26 v1(2495,2095) ; v1(2615,2095) 2955,2095 3005,2045 U1.4
  Bottom Layer w10: v1(2495,2095) v1(2615,2095)
NetR4_1: R4.1 U2.89 | length 736.3
  Top Layer w10: v1(1877.5,2358.3) 1877.5,2361.29 2032.72,2516.5 2032.72,2576.5 2185.27,2729.06 U2.89 ; v1(1965,2270) 1997.48,2270 R4.1@2040,2227.48
  Bottom Layer w10: v1(1877.5,2358.3) 1877.5,2366.7 1965,2279.2 v1(1965,2270)
NetR4_2: R4.2 R10.2 U1.1 | length 1294.2
  Top Layer w10: R4.2 2172.48,2062.52 2185,2050 v1(2185,2005) ; U1.1 3178,1970 v1(3205,1970)
  Bottom Layer w10: v1(2185,2005) 2195,1995 3180,1995 v1(3205,1970)
NetR6_2: R6.2 U2.71 | length 1617
  Top Layer w10: v1(1250,2605) 1250,2457.74 1249.84,2457.59 1249.84,2095.16 1275,2070 R6.2 ; v1(1725,2740) 1740,2755 1801.27,2755 1844.8,2798.53 1845.4,2798.53 2016.8,2969.93 2025.08,2969.93 2038.72,2983.56 2038.72,2983.85 2039,2983.85 2052.64,2997.48 2052.64,2997.77 2052.92,2997.77 2066.56,3011.4 2066.56,3011.69 2066.84,3011.69 2080.48,3025.32 2080.48,3039.52 U2.71
  Bottom Layer w10: v1(1250,2605) 1260,2595 1580,2595 v1(1725,2740)
NetR7_2: R7.2 U2.70 | length 1791.7
  Top Layer w10: R7.2 1345,1975 1370,2000 1370,2110 1345,2135 1280,2135 1264.84,2150.16 1264.84,2451.37 1288,2474.53 1349.53,2474.53 v1(1395,2520) ; v1(1772.1,2657.9) 1765,2665 1775,2665 1826.03,2716.03 1826.03,2757.76 2016.8,2948.52 2016.8,2948.71 2023.01,2954.93 2031.29,2954.93 2095.48,3019.11 2095.48,3052.36 U2.70
  Bottom Layer w10: v1(1395,2520) 1625,2520 1762.9,2657.9 v1(1772.1,2657.9)
NetR10_1: R10.1 U2.100 | length 420.5
  Top Layer w10: v1(2135,2375) 2162.72,2402.72 2198.93,2402.72 2300,2503.79 2300,2541.67 U2.100
  Bottom Layer w10: v1(2135,2265) v1(2135,2375)
NetR11_1: R11.1 U2.98 | length 468.5
  Top Layer w10: v1(2195,2460) 2199.2,2460 2252.72,2513.52 2252.72,2550.06 U2.98 ; R11.1@2345,2255 v1(2345,2260)
  Bottom Layer w10: v1(2195,2460) 2200.41,2460 2345,2315.41 v1(2345,2260)
pads on no net: J2.5 J2.6 P1.3 P1.5 P1.7 P2.1 P2.2 P2.19 P2.21 P2.23 P2.25 P3.20 P3.22 U1.5 U2.6 U2.7 U2.8 U2.9 U2.17 U2.28 U2.29 U2.38 U2.39 U2.40 U2.43 U2.44 U2.47 U2.48 U2.60 U2.61 U2.66 U2.67 U2.79 U2.80 U2.91 U2.92 U3.3 U3.6

## Silkscreen, mask and mechanical layers (free items; w line width, h text height)
Top Overlay:
  circle w10: c2485,2520 r5
  lines w5: 2770,3710 2685,3710 2685,3635 2815,3635 ; 2815,3710 2815,3635 ; 2990,3710 2990,3635 ; 3155,3710 3155,3635 ; 3270,3710 3320,3710 ; 3320,3635 3320,3710 ; 2815,3635 2990,3635 ; 2990,3635 3155,3635 ; 3155,3635 3315,3635 3450,3635 3450,3710 3320,3710
  lines w10: 1149.37,3280 1090,3280 1060,3310 1060,3465 1080,3485 1154.37,3485 ; 1150,3075 1070,3075 1060,3065 1060,2205 1080,2185 1154.37,2185 ; 1354.37,2185 1830,2185 1855,2210 1855,2580 1840,2595 1565,2595 ; 1354.37,2990 1510,2990 ; 1355,3450 1384.41,3450 ; 1360,2595 1565,2595 ; 1484.41,3455 1500,3455 1550,3405 1550,3030 1510,2990 ; 1730,2185 1730,2595 ; 3445,2345 3315,2345 3305,2355 3305,3550 3445,3550 ; 3645,2350 3770,2350 3775,2355 3775,3155 3645,3155 ; 1510,2990 1515,2990 1560,2945 1560,2600 1565,2595 ; 1990,2005 2180,2005 2180,2310 2175,2315 1990,2315 1990,2005 ; 2205,2005 2400,2005 2400,2305 2390,2315 2205,2315 2205,2005
  text "+5V" at 2725,4255 h40
  text "GND" at 2890,4255 h40
  text "PWR IN" at 3035,4240 h60
  text "ICSP" at 3345,3740 h60
  text "GND" at 2695,3650 h40
  text "MCLR" at 2835,3650 h40
  text "PGED" at 3000,3650 h40
  text "3V3" at 3330,3650 h40
  text "PGEC" at 3165,3645 h40
  text "B13" at 3325,3480 h40
  text "NC" at 3660,3480 h40
  text "F1" at 1093.33,3415 h40
  text "B12" at 3325,3385 h40
  text "NC" at 3660,3385 h40
  text "I2C" at 1640,3360 h60
  text "F2" at 1465,3335 h40
  text "F0" at 1080,3315 h40
  text "B11" at 3338.33,3280 h40
  text "NC" at 3660,3280 h40
  text "F3" at 1465,3275 h40
  text "NC" at 1080,3215 h40
  text "F4" at 1465,3215 h40
  text "B10" at 3325,3185 h40
  text "NC" at 3660,3185 h40
  text "F5" at 1465,3155 h40
  text "NC" at 1080,3115 h40
  text "B9" at 3358.32,3080 h40
  text "G15" at 3660,3080 h40
  text "F8" at 1365,3025 h40
  text "D9" at 1080,3015 h40
  text "B8" at 3358.32,2980 h40
  text "G14" at 3660,2980 h40
  text "E9" at 1365,2920 h40
  text "D8" at 1080,2915 h40
  text "B5" at 3358.32,2880 h40
  text "G13" at 3660,2880 h40
  text "D7" at 1080,2815 h40
  text "E8" at 1365,2815 h40
  text "B4" at 3358.32,2775 h40
  text "G12" at 3660,2775 h40
  text "E7" at 1365,2725 h40
  text "D6" at 1080,2715 h40
  text "B3" at 3358.32,2670 h40
  text "G9" at 3660,2670 h40
  text "E6" at 1365,2620 h40
  text "D5" at 1080,2615 h40
  text "B2" at 3358.32,2575 h40
  text "G8" at 3660,2575 h40
  text "D4" at 1080,2515 h40
  text "E5" at 1740,2510 h40
  text "B1" at 3371.65,2485 h40
  text "G7" at 3660,2485 h40
  text "D2" at 1080,2415 h40
  text "E3" at 1740,2410 h40
  text "B0" at 3358.32,2380 h40
  text "G6" at 3660,2380 h40
  text "PIC 24E512GU810 / Extension card / 1925 / DnE AB" at 2695,2375 h40
  text "D1" at 1093.33,2315 h40
  text "E1" at 1740,2310 h40
  text "NC" at 3358.32,2280 h40
  text "NC" at 3660,2280 h40
  text "E0" at 1740,2220 h40
  text "D0" at 1080,2215 h40
  text "Jumpers: / (R3 and R4) or / (R10 and R11)" at 2415,2115 h40
  text "CAN BUS" at 3655,1630 h60 r90
  text "+3V3" at 2160,1580 h40
  text "GND" at 2345,1580 h40
  text "PWR IN" at 2145,1495 h60
  text "+3V3" at 3530,-920 h40
  text "GND" at 3715,-920 h40
  text "PWR" at 3590,-1015 h60
Mechanical 13:
  the board outline again, w10

## Text inside footprints (layer, text, board x,y; h text height)
D4: Top Overlay "*" at 2024.61,3605.75 h50 r135; Mechanical 13 "*" at 1984.5,3645.85 h50 r135
P1: Top Overlay "2" at 3320,3780 h50 r180; Top Overlay "1" at 3300,3880 h50 r180; Top Overlay "9" at 2760,3880 h50 r180; Top Overlay "10" at 2760,3780 h50 r180
P2: Top Overlay "26" at 3515,3560 h50 r90; Top Overlay "25" at 3615,3560 h50 r90; Top Overlay "1" at 3615,2200 h50 r90; Top Overlay "2" at 3515,2200 h50 r90
P3: Top Overlay "26" at 1224.37,3495 h50 r90; Top Overlay "25" at 1324.37,3495 h50 r90; Top Overlay "1" at 1324.37,2135 h50 r90; Top Overlay "2" at 1224.37,2135 h50 r90
P4: Top Overlay "1" at 1613.41,3422.13 h40 r90
U1: Top Overlay "*" at 3172,1969.5 h50 r270; Mechanical 13 "*" at 3125.5,1926 h50 r270
U2: Top Overlay "*" at 2475.72,2533.15 h50 r135; Mechanical 13 "*" at 2420.21,2609.87 h50 r135
U3: Top Overlay "*" at 2008.84,4070.5 h50 r90; Mechanical 13 "*" at 2057.25,4108 h50 r90